# Altium PCB UZ_D_Template.PcbDoc
Units mm, origin at the board's own origin, x right, y up, seen from the top; angles counter-clockwise.
Board outline 155.98 x 100 mm, 4 copper layers (Top Layer, Layer 1, Layer 2, Bottom Layer), stack 0.98 mm thick; 24 components, 57 nets, 138 pads, 0 vias.
Unrouted connection lines stored in the file: 179.
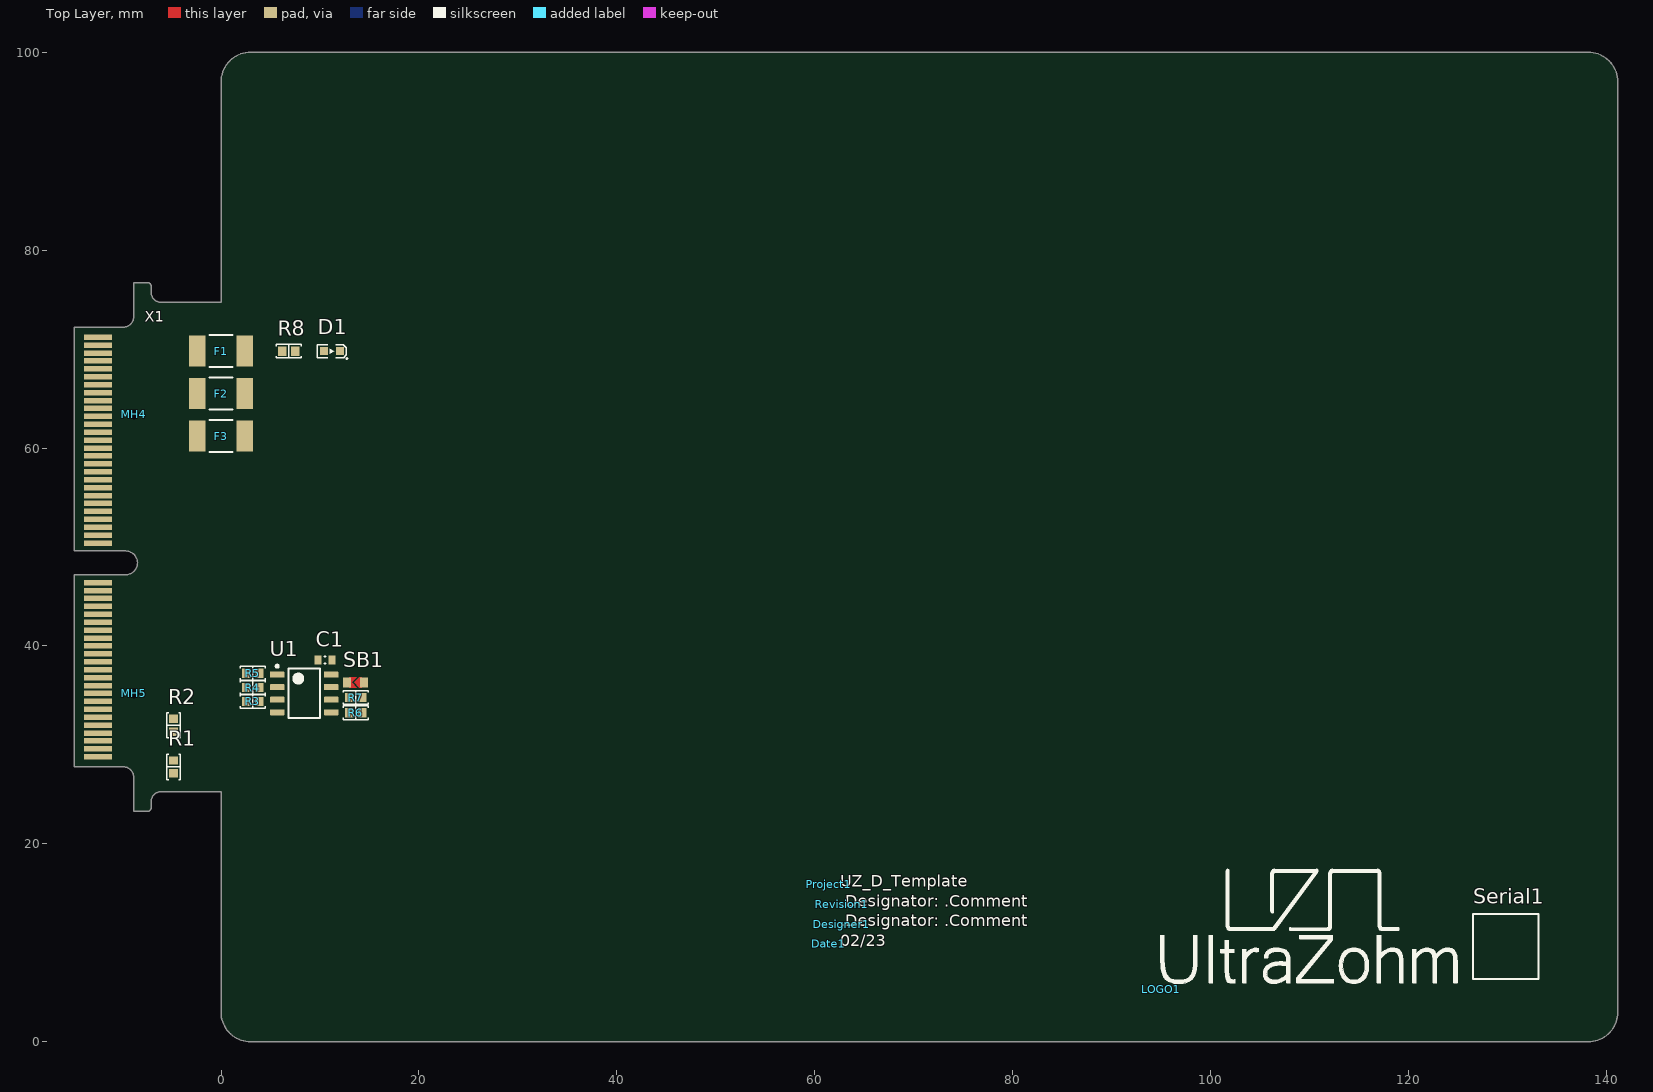
[diagram p0: Top Layer view]
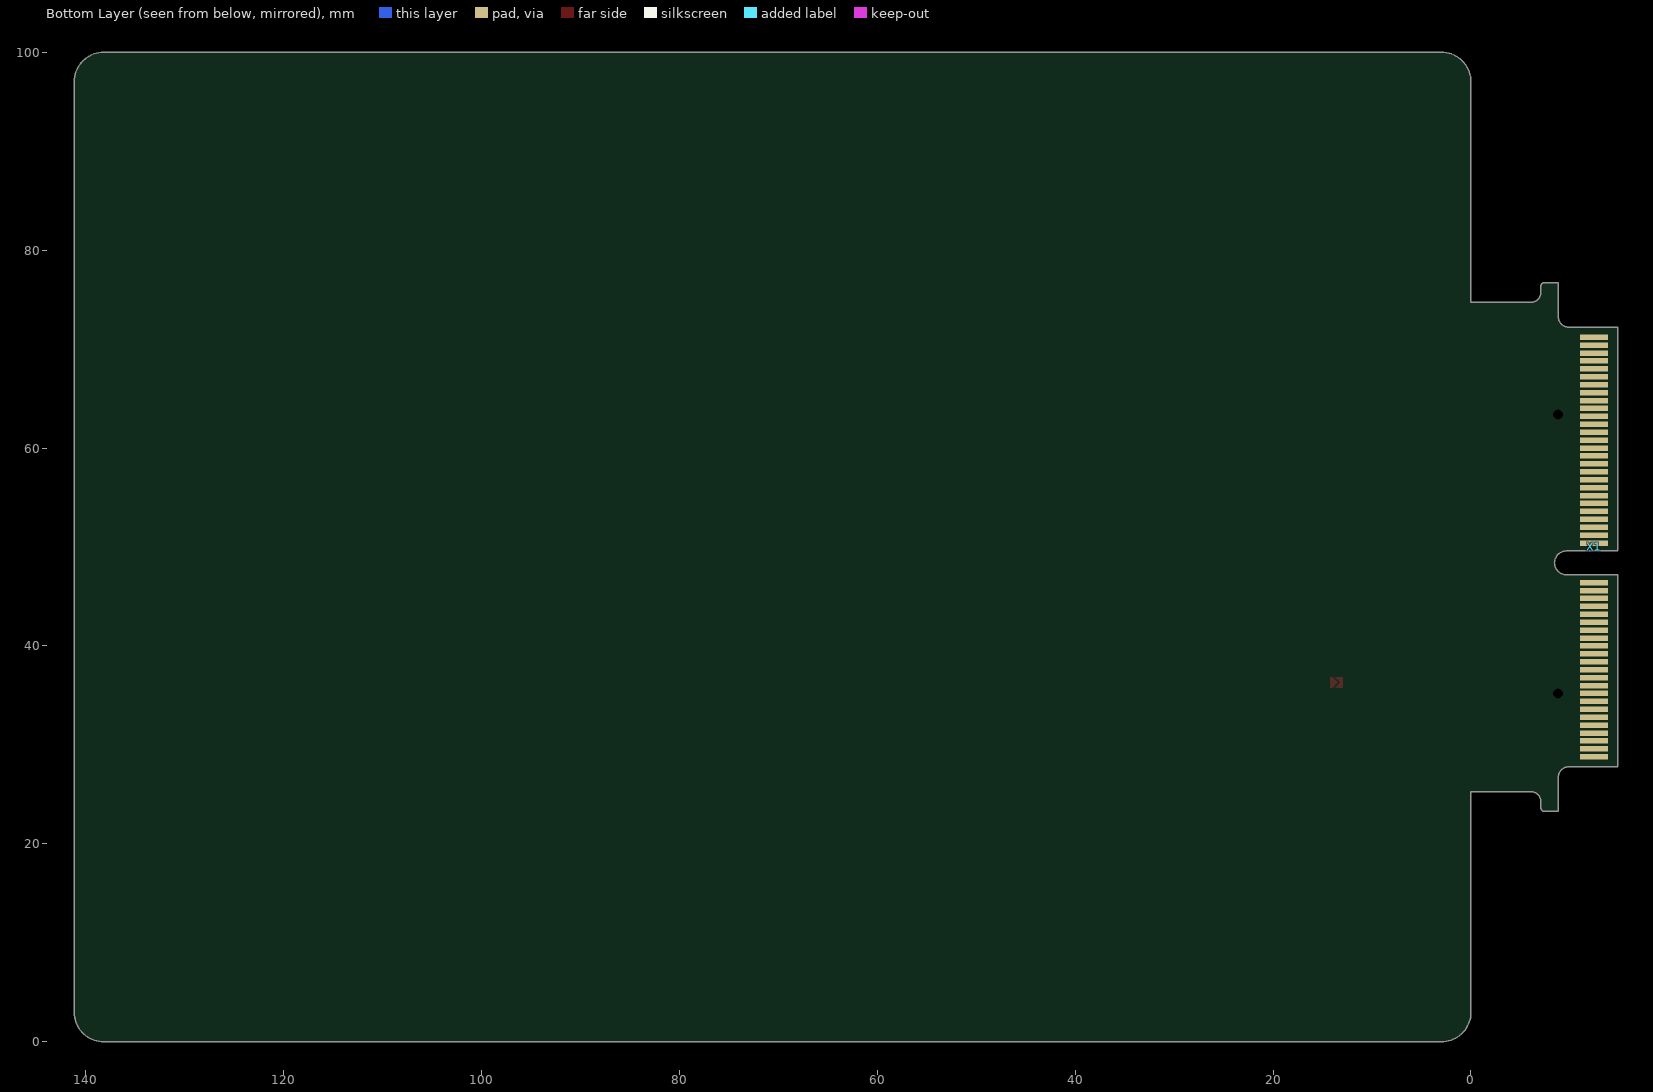
[diagram p1: Bottom Layer view, seen from below]

## Layer stack, top to bottom
Top Solder: solder mask 0.0102, Solder Resist, Dk 3.5
Top Layer: signal copper 0.035
Dielectric 2: prepreg 0.115, FR-4, Dk 4.4
Dielectric 4: prepreg 0.115, FR-4, Dk 4.4
Layer 1: signal copper 0.035
Dielectric 1: core 0.38, Core-036, Dk 4.4
Layer 2: signal copper 0.035
Dielectric 5: prepreg 0.115, FR-4, Dk 4.4
Dielectric 3: prepreg 0.115, FR-4, Dk 4.4
Bottom Layer: signal copper 0.035
Bottom Solder: solder mask 0.0102, Solder Resist, Dk 3.5

## Board outline
-14.84,27.775 -9.84,27.775 cw(c-9.84,26.775) -8.84,26.775 -8.84,23.275 -7.46,23.275 ccw(c-7.46,23.675) -7.06,23.675 -7.06,24.275 cw(c-6.06,24.275) -6.06,25.275 0,25.275 0,3 ccw(c3,3) 3,0 138.141,0 ccw(c138.141,3) 141.141,3 141.141,97 ccw(c138.141,97) 138.141,100 3,100 ccw(c3,97) 0,97 0,74.725 -6.06,74.725 cw(c-6.06,75.725) -7.06,75.725 -7.06,76.325 ccw(c-7.46,76.325) -7.46,76.725 -8.84,76.725 -8.84,73.225 cw(c-9.84,73.225) -9.84,72.225 -14.84,72.225 -14.84,49.6 -9.64,49.6 cw(c-9.64,48.4) -9.64,47.2 -14.84,47.2

## Design rules (kind name [scope] priority, off if disabled: settings)
AssemblyTestPointUsage [InNetClass('3V3_SingleEnded') or InNetClass('5V_SingleEnded') or InNetClass('15V_SingleEnded') or InNetClass('DifferentialSignals')] p1:
BoardOutlineClearance [All] p1: gap=0.5 ignorepadtopadclearanceinfootprint=FALSE except(0: Arc-SplitContinuation Track-SplitContinuation SMDPad-SplitContinuation THPad-SplitContinuation Via-SplitContinuation Fill-SplitContinuation Poly-SplitContinuation Region-SplitContinuation Text-SplitContinuation)
Clearance Clearance_Differential [InNetClass('DifferentialSignals')] p1: gap=0.1 ignorepadtopadclearanceinfootprint=TRUE except(0: Arc-Hole Track-Hole SMDPad-Hole THPad-Hole Via-Hole Fill-Hole Poly-Hole Region-Hole Text-Hole; 0.3: SMDPad-Via; 0.4: THPad-Via)
Clearance Clearance_Power [InNetClass('Power')] p2: gap=0.1 ignorepadtopadclearanceinfootprint=TRUE except(0: Arc-Hole Track-Hole SMDPad-Hole THPad-Hole Via-Hole Fill-Hole Poly-Hole Region-Hole Text-Hole; 0.15: Via-Poly; 0.2: Track-Poly; 0.25: THPad-Poly; 0.3: Fill-Poly Poly-Region; 0.5: Poly-Poly)
Clearance [All] p3: gap=0.1 ignorepadtopadclearanceinfootprint=TRUE except(0: Arc-Hole Track-Hole SMDPad-Hole THPad-Hole Via-Hole Fill-Hole Poly-Hole Region-Hole Text-Hole; 0.4: SMDPad-Via THPad-Via; 0.5: Poly-Poly)
ComponentClearance [All] p1: gap=0.1 collisioncheckmode=3 verticalgap=0.1 showdistances=FALSE
DiffPairsRouting [InNetClass('DifferentialSignals')] p1: maxlimit=0.25 minlimit=0.127 mostfreqgap=0.25 toplayer_maxgap=0.127 toplayer_prefgap=0.127 toplayer_minwidth=0.285 toplayer_maxwidth=0.285 toplayer_prefwidth=0.285 midlayer1_minwidth=0.069 midlayer1_maxwidth=0.15 midlayer1_prefwidth=0.15 midlayer2_mingap=0.165 midlayer2_minwidth=0.1 midlayer2_maxwidth=0.15 midlayer2_prefwidth=0.15 bottomlayer_maxgap=0.127 bottomlayer_prefgap=0.127 bottomlayer_minwidth=0.285 bottomlayer_maxwidth=0.285 bottomlayer_prefwidth=0.285 impedanceprofiledriven=TRUE impedanceprofileid={5F7DE71B-7B0B-4CDE-8AE7-8AD61221F3A5} impedanceprofilevalue=100.000000 maxuncoupledlength=12.7
FanoutControl Fanout_Power [InNetClass('Power') or InNet('ENABLE')] p1: bgadir=Out bgaviamode=Centered fanoutstyle=Auto fanoutdirection=None viagrid=0.025
FanoutControl Fanout_RS422 [InNetClass('DifferentialSignals')] p2: bgadir=Out bgaviamode=Closest fanoutstyle=Rows fanoutdirection=OutOnly viagrid=0.025
FanoutControl Fanout_BGA [IsBGA] p3 off: bgadir=Out bgaviamode=Centered fanoutstyle=Auto fanoutdirection=Alternating viagrid=0.025 // Fanout_BGA (Default Rule)
FanoutControl Fanout_LCC [IsLCC] p4 off: bgadir=Out bgaviamode=Centered fanoutstyle=Auto fanoutdirection=Alternating viagrid=0.025 // Fanout_LCC (Default Rule)
FanoutControl Fanout_SOIC [IsSOIC] p5 off: bgadir=Out bgaviamode=Centered fanoutstyle=Auto fanoutdirection=Alternating viagrid=0.025 // Fanout_SOIC (Default Rule)
FanoutControl Fanout_Small [(CompPinCount < 5)] p6 off: bgadir=Out bgaviamode=Centered fanoutstyle=Auto fanoutdirection=OutThenIn viagrid=0.025 // Fanout_Small (Default Rule)
FanoutControl Fanout_Default [All] p7: bgadir=NE bgaviamode=Closest fanoutstyle=Rows fanoutdirection=InOnly viagrid=0.025 // Fanout_Default (Default Rule)
Height [All] p1: minheight=0 maxheight=50 prefheight=12.7
HoleSize [All] p1: absolutevalues=TRUE maxlimit=4 minlimit=0.025 maxpercent=80.000 minpercent=20.000
PolygonConnect PolygonConnect_Therm [HoleSize > 2.6] p1: connectstyle=Direct reliefconductorwidth=0.254 reliefentries=4 polygonreliefangle="90 Angle" airgapwidth=0.254
PolygonConnect PolygonConnect_via [InPadClass('pad') or IsVia] p2: connectstyle=Direct reliefconductorwidth=0.254 reliefentries=4 polygonreliefangle="90 Angle" airgapwidth=0.254
PolygonConnect [All] p3: connectstyle=Relief reliefconductorwidth=0.3 reliefentries=4 polygonreliefangle="90 Angle" airgapwidth=0.25
RoomDefinition Component_LowerEdgeKeepOut [All] p1: confinementstyle=ConfineOut formatcopy=TRUE lockcomponents=FALSE outline 0,0 142,0 142,3 0,3
RoomDefinition Component_UpperEdgeKeepOut [All] p2: confinementstyle=ConfineOut formatcopy=TRUE lockcomponents=FALSE outline 0,97 142,97 142,100 0,100
RoutingLayers RoutingLayers_3V3Signals [InNetClass('3V3_SingleEnded')] p1 off: top layer_v5=TRUE mid layer 1_v5=TRUE mid layer 2_v5=TRUE bottom layer_v5=TRUE
RoutingLayers RoutingLayers_SingleEnded [InNetClass('15V_SingleEnded') or InNetClass('3V3_SingleEnded') or InNetClass('5V_SingleEnded')] p2 off: top layer_v5=TRUE mid layer 1_v5=TRUE mid layer 2_v5=TRUE bottom layer_v5=TRUE
RoutingLayers RoutingLayers_Differential [InNetClass('DifferentialSignals')] p3 off: top layer_v5=TRUE mid layer 1_v5=TRUE mid layer 2_v5=TRUE bottom layer_v5=FALSE
RoutingLayers [All] p4: top layer_v5=TRUE mid layer 1_v5=TRUE mid layer 2_v5=TRUE bottom layer_v5=TRUE
RoutingVias [All] p1: holewidth=0.3 width=0.5 viastyle="Through Hole" minholewidth=0.2 minwidth=0.4 maxholewidth=0.5 maxwidth=1
SolderMaskExpansion [All] p1: expansion=0.102 istentingtop=FALSE
UnRoutedNet UnRoutedNet_Signals [InNetClass('15V_SingleEnded') or InNetClass('3V3_SingleEnded') or InNetClass('5V_SingleEnded') or InNetClass('DifferentialSignals')] p1: checkbadconnections=TRUE
UnRoutedNet [All] p2: checkbadconnections=TRUE
Width Width_Power [InNetClass('Power')] p1: maxlimit=10 minlimit=0.2 preferedwidth=0.3 minimp=50.000000 maximp=50.000000 favimp=50.000000
Width [All] p2: maxlimit=10 minlimit=0.1 preferedwidth=0.3 midlayer1_prefwidth=0.15 midlayer2_prefwidth=0.15 minimp=50.000000 maximp=50.000000 favimp=50.000000
18 further rules are at their usual default settings.

## Classes and differential pairs
component class X1: C1 D1 F1 F2 F3 R1 R2 R3 R4 R5 R6 R7 R8 SB1 U1 X1

## Components (designator, comment, footprint, x,y, rotation, side; value= is the part's Value field where it differs from the comment)
C1 "100 nF" C_0603 10.5,38.6 r180 top
D1 "150060BS84000" WL-SMCW_0603 11.2,69.8 r180 top
Date1 "02/23" COMMENT 61.43,9.9 r0 top
Designer1 "A. Musterfrau" Designator:comment 62.7,11.9 r0 top
F1 "Littelfuse_PTC_1812" 1812_PTC_Polyfuse_Littelfuse 0,69.8 r0 top value="PTC, 1.1 A, 24V"
F2 "Littelfuse_PTC_1812" 1812_PTC_Polyfuse_Littelfuse 0,65.5 r0 top value="PTC, 1.1 A, 24V"
F3 "Littelfuse_PTC_1812" 1812_PTC_Polyfuse_Littelfuse 0,61.2 r0 top value="PTC, 1.1 A, 24V"
LOGO1 "UZ Logo" UZ_Logo_small 94.996,5.334 r0 top
MH4 "alignment hole 1mm" MH_1#1 -7,56.6 r90 top
MH5 "alignment hole 1mm" MH_1#2 0.1,46.6 r90 top (schematic designator MH4)
Project1 "UZ_D_Template" COMMENT 61.43,15.9 r0 top
R1 "0R" "RES 0603_1608" -4.8,27.775 r90 top
R2 "0R" "RES 0603_1608" -4.8,31.991 r270 top
R3 "4k7" "RES 0603_1608" 3.2,34.391 r180 top
R4 "4k7" "RES 0603_1608" 3.2,35.8 r180 top
R5 "4k7" "RES 0603_1608" 3.2,37.25 r180 top
R6 "100k" "RES 0603_1608" 13.6,33.261 r0 top
R7 "100k" "RES 0603_1608" 13.6,34.791 r0 top
R8 "24k9" "RES 0603_1608" 6.85,69.8 r180 top
Revision1 "Rev01" Designator:comment 62.7,13.9 r0 top
SB1 "Solder Bump 0603" SB_0603 13.6,36.308 r0 top
Serial1 "Serial #" SERIAL 128.524,11.733 r0 top
U1 "M24C02-WMN6TP" D0008A_N 8.4,35.203 r0 top
X1 "HSEC8-150-01-XX-DV-A-BL-CARD" HSEC8-150-01-XX-DV-A-BL-CARD -14.84,50 r270 bottom locked

## Footprints (in the part's own frame and the unit in brackets; to place one, negate y for a bottom-side part, rotate by r counter-clockwise, add the part's x,y. Pads: shape width x height; smd on the part's side, far side on the other; paste and mask are expansions set on the pad)
1812_PTC_Polyfuse_Littelfuse [mm] "Chip Fuse, 2-Leads, Body 4.6x3.24mm"
  rect 1.68x3.14 smd: 1(-2.39,0) 2(2.39,0)
  silkscreen extent -1.15,-1.62 1.15,1.62, body extent -2.3,-1.62 2.3,1.62, height 1.15
C_0603 [mm] "Chip Capacitor, Body 1.6x0.8mm, Height 1.0mm, IPC High Density"
  rect 0.7x0.9 smd: 1(-0.7,0) 2(0.7,0)
  silkscreen extent -0.05,-0.35 0.05,0.35, body extent -0.87,-0.47 0.88,0.48, height 1
COMMENT [mm] "prints out the comment of a component"
D0008A_N [mm] "SOIC, 8-Leads, Body 5x4mm, Pitch 1.27mm, IPC Medium Density"
  rrect17% 1.45x0.6 smd: 1(-2.725,1.905) 2(-2.725,0.635) 3(-2.725,-0.635) 4(-2.725,-1.905) 5(2.725,-1.905) 6(2.725,-0.635) 7(2.725,0.635) 8(2.725,1.905)
  silkscreen extent -2.85,-2.5 1.6,2.88, body extent -3,-2.45 3,2.45, height 1.63
Designator:comment [mm] "prints out designator and comment of a component"
HSEC8-150-01-XX-DV-A-BL-CARD [mm]
  rect 0.55x2.8 smd far side mask+0.05: 1(-21.2,-2.4) 3(-20.4,-2.4) 5(-19.6,-2.4) 7(-18.8,-2.4) 9(-18,-2.4) 11(-17.2,-2.4) 13(-16.4,-2.4) 15(-15.6,-2.4) 17(-14.8,-2.4) 19(-14,-2.4) 21(-13.2,-2.4) 23(-12.4,-2.4) 25(-11.6,-2.4) 27(-10.8,-2.4) 29(-10,-2.4) 31(-9.2,-2.4) 33(-8.4,-2.4) 35(-7.6,-2.4) 37(-6.8,-2.4) 39(-6,-2.4) 41(-5.2,-2.4) 43(-4.4,-2.4) 45(-3.6,-2.4) 47(-2.8,-2.4) 49(-2,-2.4) 51(-1.2,-2.4) 53(-0.4,-2.4) 55(3.6,-2.4) 57(4.4,-2.4) 59(5.2,-2.4) 61(6,-2.4) 63(6.8,-2.4) 65(7.6,-2.4) 67(8.4,-2.4) 69(9.2,-2.4) 71(10,-2.4) 73(10.8,-2.4) 75(11.6,-2.4) 77(12.4,-2.4) 79(13.2,-2.4) 81(14,-2.4) 83(14.8,-2.4) 85(15.6,-2.4) 87(16.4,-2.4) 89(17.2,-2.4) 91(18,-2.4) 93(18.8,-2.4) 95(19.6,-2.4) 97(20.4,-2.4) 99(21.2,-2.4)
  rect 0.55x2.8 smd mask+0.05: 2(-21.2,-2.4) 4(-20.4,-2.4) 6(-19.6,-2.4) 8(-18.8,-2.4) 10(-18,-2.4) 12(-17.2,-2.4) 14(-16.4,-2.4) 16(-15.6,-2.4) 18(-14.8,-2.4) 20(-14,-2.4) 22(-13.2,-2.4) 24(-12.4,-2.4) 26(-11.6,-2.4) 28(-10.8,-2.4) 30(-10,-2.4) 32(-9.2,-2.4) 34(-8.4,-2.4) 36(-7.6,-2.4) 38(-6.8,-2.4) 40(-6,-2.4) 42(-5.2,-2.4) 44(-4.4,-2.4) 46(-3.6,-2.4) 48(-2.8,-2.4) 50(-2,-2.4) 52(-1.2,-2.4) 54(-0.4,-2.4) 56(3.6,-2.4) 58(4.4,-2.4) 60(5.2,-2.4) 62(6,-2.4) 64(6.8,-2.4) 66(7.6,-2.4) 68(8.4,-2.4) 70(9.2,-2.4) 72(10,-2.4) 74(10.8,-2.4) 76(11.6,-2.4) 78(12.4,-2.4) 80(13.2,-2.4) 82(14,-2.4) 84(14.8,-2.4) 86(15.6,-2.4) 88(16.4,-2.4) 90(17.2,-2.4) 92(18,-2.4) 94(18.8,-2.4) 96(19.6,-2.4) 98(20.4,-2.4) 100(21.2,-2.4)
MH_1#1 [mm]
  round 0 hole 1 unplated mask-2539.97: 1(6.8,1.8)
MH_1#2 [mm]
  round 0 hole 1 unplated: 1(-11.4,8.9)
"RES 0603_1608" [mm] "Chip Resistor, 2-Leads, Body 1.60x0.80mm, IPC Medium Density"
  rect 0.85x0.95 smd: 1(-0.65,0) 2(0.65,0)
  silkscreen extent -1.27,-0.7 1.27,0.7, body extent -0.8,-0.4 0.8,0.4, height 0.45
SB_0603 [mil] "Solder Bump"
  rect 32x40 smd: 1(33.75,0) 2(-33.75,0)
  Top Layer region: 23.75,20 13.75,20 -6.25,0 13.75,-20 23.75,-20
  Top Layer region: -26.25,0 -16.25,0 3.75,20 -26.25,20
  Top Layer region: -26.25,0 -16.25,0 3.75,-20 -26.25,-20
SERIAL [mm]
  silkscreen extent -2,-5.4 4.6,1.2
UZ_Logo_small [mm] "logo width 3cm"
  silkscreen extent -0.05,0.57 29.94,12.12
WL-SMCW_0603 [mm] "SMD Mono-color Chip LED, body 1.6x0.8mm"
  rect 0.8x0.8 smd: 1(-0.8,0) 2(0.8,0)
  silkscreen extent -1.59,-0.65 1.45,0.83, body extent -0.8,-0.4 0.8,0.4, height 0.7

## Part data
C1: library part C0603C104K9PACTU, "Capacitor 0603, 6.3 VDC, 100 nF, X5R", Device Package=0603, Manufacturer=KEMET, Operating Temperature="-55 - 85°C", Supplier Part Number 1=80-C0603C104K9P, Tolerance="10 %", Voltage Rating="6.3 VDC", Component Type="Capacitor 0603", ComponentLink1Description=Datasheet, ComponentLink1URL=https://www.mouser.de/datasheet/2/212/KEM_C1006_X5R_SMD-1103249.pdf, Created from=MGremer, Created On="20.12.2020 13:54:13", Last Updated="20.01.2021 13:57:36", Live Cycle Status=1, Manufacturer Part Number=C0603C104K9PACTU, Mounting Type=SMD, PartID=70, Series="SMD Comm X5R", Stock number="not stored", Supplier 1=Mouser, Type=Capacitor
D1: "WL-SMCW SMD Mono-color Chip LED Waterclear Blue", Color=blue, Device Package=0603, Forward Current I_f="20 mA", Forward Voltage U_f="3.2 V", Manufacturer="Wuerth Elektronik", Nominal Power="78 mW", Operating Temperature="-40 - 85 °C", Supplier Part Number 1=710-150060BS84000, Component Type="LED Diode", ComponentLink1Description=Datasheet, ComponentLink1URL=https://www.mouser.de/datasheet/2/445/150060BS84000-1838909.pdf, Created from=MGremer, Created On="08.12.2020 10:19:38", Last Updated="03.03.2021 09:59:51", Light Intensity="560 mcd", Live Cycle Status=1, Manufacturer Part Number=150060BS84000, Mounting Type=SMD, PartID=1, Stock number="not stored", Supplier 1=Mouser, Supplier 2=Farnell, Supplier 3=Digi-Key, Supplier Part Number 2=3408611, Supplier Part Number 3=732-150060BS84000CT-ND, Type=Standard, Wavelength="470 nm"
Date1: library part 5, "Create a project parameter named \"FinDate\" this is the value of this component. It is printed on the PCB. Once the parameter is updated (e.g. new revision) it gets updated on the PCB as well", Manufacturer="PCB Manufacturer", Manufacturer Part Number="Project End Date", Component Type="Date of Project Finalization", Created from="T. Wendt", Created On="01.03.2021 09:01:41", Last Updated="01.03.2021 09:01:41", Live Cycle Status=1, PartID=5, Type="Standard (No BOM)"
Designer1: library part 4, "Create a project parameter named \"Author\" this is the value of this component. It is printed on the PCB. Once the parameter is updated (e.g. new revision) it gets updated on the PCB as well", Manufacturer="PCB Manufacturer", Manufacturer Part Number="Project Author", Component Type="Project Author", Created from="T. Wendt", Created On="01.03.2021 08:53:41", Last Updated="01.03.2021 09:20:27", Live Cycle Status=1, PartID=4, Type="Standard (No BOM)"
F1 F2 F3: "POLYSWITCH RESETTABLE DEVICES", Hold Current=1.1A, LCSC Part Number=C70119, Manufacturer=Littelfuse, MPN=miniASMDC110F/24, Nominal current="1 A", Operating Temperature="-40 - 85 °C", Package=1812, Resistance="0.18 Ohm", Supplier Part Number 1=530-0ZCG0150BF2C, Trip Current=2.2A, Voltage=24V, Component Type=Littelfuse_PTC_1812, ComponentLink1Description=Datasheet, ComponentLink1URL=https://www.littelfuse.com/~/media/electronics/datasheets/resettable_ptcs/littelfuse_ptc_surface_mount_catalog_datasheet.pdf.pdf, Created=2019_02_10_AGeiger, Created from=MHlatky, Created On="07.05.2021 06:50:33", Last Updated="27.05.2022 15:06:17", Live Cycle Status=1, Manufacturer Part Number=Littelfuse_PTC_1812, MF=Littelfuse, Mounting Type=SMD, PartID=5, Supplier 1=Mouser, Type=Fuse
LOGO1: library part 1, "Official Project Logo of the UltraZohm", Manufacturer="PCB Manufacturer", Manufacturer Part Number="UltraZohm Logo", Component Type=Logo, ComponentLink1Description=Homepage, ComponentLink1URL=https://ultrazohm.com, Created from="T. Wendt", Created On="19.02.2021 16:55:56", Last Updated="02.03.2021 14:31:24", Live Cycle Status=1, PartID=1, Type="Standard (No BOM)"
MH4 MH5: library part "Mounting Hole - 1mm", "Non plated through hole, 1mm"
Project1: library part 2, "Create a project parameter named \"ProjectNameCustom\" this is the value of this component and it is printed on the PCB.", Manufacturer="PCB Manufacturer", Manufacturer Part Number="Project Name", Component Type="Project Name", Created from="T. Wendt", Created On="01.03.2021 08:43:57", Last Updated="01.03.2021 09:07:27", Live Cycle Status=1, PartID=2, Type="Standard (No BOM)"
R1 R2: library part RC0603JR-070RL, "SMD resistor E24 series", Device Package=0603, LCSC Part Number=C21189, Manufacturer=YAGEO, Supplier Part Number 1=603-RC0603JR-070RL, Tolerance=5%, Component Type="SMD resistor", ComponentLink1Description=Datasheet, ComponentLink1URL=https://www.mouser.de/datasheet/2/447/PYu-RC_Group_51_RoHS_L_10-1664068.pdf, Created from=MGremer, Created On="14.12.2020 16:17:14", Last Updated="04.03.2021 09:09:42", Live Cycle Status=1, Manufacturer Part Number=RC0603JR-070RL, Mounting Type=SMD, PartID=1, Stock number="Labor SMD Container", Supplier 1=Mouser, Supplier 2=LCSC, Supplier Part Number 2=C21189, Type=Resistor
R3 R4 R5: library part 0603WAF4701T5E, "SMD resistor E24 series", Device Package=0603, LCSC Part Number=C23162, Manufacturer=UNI-ROYAL, Tolerance=1%, Component Type="SMD resistor", ComponentLink1Description=Datasheet, ComponentLink1URL=https://datasheet.lcsc.com/lcsc/2206010116_UNI-ROYAL-Uniroyal-Elec-0603WAF4701T5E_C23162.pdf, Created from=AGeiger, Created On="14.12.2020 16:17:14", Last Updated="25.08.2022 20:03:04", Live Cycle Status=1, Manufacturer Part Number=0603WAF4701T5E, Mounting Type=SMD, PartID=90, Stock number="Labor SMD Container", Supplier 1=LCSC, Supplier Part Number 1=C23162, Type=Resistor
R6 R7: library part RK73B1JTTD104J, "SMD resistor E24 series", Device Package=0603, LCSC Part Number=C25803, Manufacturer="KOA Speer", Supplier Part Number 1=660-RK73B1JTTD104J, Tolerance=5%, Component Type="SMD resistor", ComponentLink1Description=Datasheet, ComponentLink1URL=https://www.mouser.de/datasheet/2/219/RK73B-1825463.pdf, Created from=MGremer, Created On="14.12.2020 16:17:14", Last Updated="27.05.2022 14:04:10", Live Cycle Status=1, Manufacturer Part Number=RK73B1JTTD104J, Mounting Type=SMD, PartID=122, Stock number="Labor SMD Container", Supplier 1=Mouser, Type=Resistor
R8: library part CRCW060324K9FKEA, "SMD resistor 1%", Device Package=0603, Manufacturer=Vishay, Supplier Part Number 1=71-CRCW0603-24.9K-E3, Tolerance=1%, Component Type="SMD resistor", ComponentLink1Description=Datasheet, ComponentLink1URL=https://www.mouser.de/datasheet/2/427/dcrcwe3-1762152.pdf, Created from=MGremer, Created On="14.12.2020 16:17:14", Last Updated="02.03.2021 14:07:32", Live Cycle Status=1, Manufacturer Part Number=CRCW060324K9FKEA, Mounting Type=SMD, PartID=157, Stock number="not stored", Supplier 1=Mouser, Type=Resistor
Revision1: library part 3, "Create a project parameter named \"ProjectRevision\" this is the value of this component. It is printed on the PCB. Once the parameter is updated (e.g. new revision) it gets updated on the PCB as well", Manufacturer="PCB Manufacturer", Manufacturer Part Number="Project Revision", Component Type="Project Revision", Created from="T. Wendt", Created On="01.03.2021 08:50:34", Last Updated="01.03.2021 09:28:36", Live Cycle Status=1, PartID=3, Type="Standard (No BOM)"
SB1: library part =Value, Device Package=0603, Component Type="Solder Bump", Created from=AGeiger, Created On="09.01.2024 17:13:56", Last Updated="09.01.2024 17:13:56", Manufacturer Part Number="Solder Bump 0603", Mounting Type=SMD, PartID=1, Revision="July-2002: Re-released for DXP Platform."
Serial1: library part 6, "Field to put in a serial number", Manufacturer="PCB Manufacturer", Manufacturer Part Number="Serial Number", Component Type="Serial Number", Created from="T. Wendt", Created On="02.03.2021 14:31:24", Last Updated="02.03.2021 14:31:24", Live Cycle Status=1, PartID=6, Type="Standard (No BOM)"
U1: "2Kbit I2C SOP-8 EEPROM ROHS", Device Package=SOIC-8, LCSC Part Number=C7562, Manufacturer=STMicroelectronics, Operating Temperature="-40 to +85 °C", Supplier Part Number 1=511-M24C02-WMN6TP, Component Type=EEPROM, ComponentLink1Description=Datasheet, ComponentLink1URL=https://www.st.com/resource/en/datasheet/m24c01-w.pdf, Created from=AGeiger, Created On="19.11.2023 14:54:27", Last Updated="19.11.2023 21:39:04", Manufacturer Part Number=M24C02-WMN6TP, Mounting Type=SMD, PartID=1, Series=M24xxx, Supplier 1=Mouser, Supplier 2=LCSC, Supplier Part Number 2=C7562, Type=Memory
X1: "Mating Card Layout for HSEC8-150-01-XX-DV-A-BL", Manufacturer=SAMTEC, Created=2018_04_23_AGeiger

## Nets (pads, with @x,y where several pads share a name; then routed paths per layer and width w, separated by ;. In a path a pad name is that pad's centre, name@x,y a point inside that pad or via, vN(x,y) a via of type N, cw(c..) or ccw(c..) an arc to the next point about the centre after c; other vN are vias at no path point)
3V3: F3.2
3V3_PER: C1.1 F3.1 R3.2 R4.2 R5.2 R6.2 R7.2 SB1.1 U1.8 X1.13 X1.14
5V: F2.2
5V_PER: F2.1 X1.9 X1.10
ADDR_0: R5.1 U1.1 X1.79
ADDR_1: R4.1 U1.2 X1.95
ADDR_2: R3.1 U1.3 X1.80
Collective_FLT: X1.96
CPLD_DigIn_01: X1.83
CPLD_DigIn_02: X1.85
CPLD_DigOut_01: X1.84
CPLD_DigOut_02: X1.86
DIG_IO_00: X1.17
DIG_IO_01: X1.18
DIG_IO_02: X1.21
DIG_IO_03: X1.22
DIG_IO_04: X1.25
DIG_IO_05: X1.26
DIG_IO_06: X1.29
DIG_IO_07: X1.30
DIG_IO_08: X1.33
DIG_IO_09: X1.34
DIG_IO_10: X1.37
DIG_IO_11: X1.38
DIG_IO_12: X1.41
DIG_IO_13: X1.42
DIG_IO_14: X1.45
DIG_IO_15: X1.46
DIG_IO_16: X1.49
DIG_IO_17: X1.50
DIG_IO_18: X1.53
DIG_IO_19: X1.54
DIG_IO_20: X1.57
DIG_IO_21: X1.58
DIG_IO_22: X1.61
DIG_IO_23: X1.62
DIG_IO_24: X1.65
DIG_IO_25: X1.66
DIG_IO_26: X1.69
DIG_IO_27: X1.70
DIG_IO_28: X1.73
DIG_IO_29: X1.74
DIG_Res_00: X1.78
DIG_Res_03: X1.91
DIG_Res_04: X1.92
DIG_Res_05: X1.93
DIG_Res_06: X1.94
DIG_Res_08: X1.77
GND: C1.2 D1.1 R1.1 U1.4 X1.1 X1.2 X1.3 X1.4 X1.7 X1.8 X1.11 X1.12 X1.15 X1.16 X1.19 X1.20 X1.23 X1.24 X1.27 X1.28 X1.31 X1.32 X1.35 X1.36 X1.39 X1.40 X1.43 X1.44 X1.47 X1.48 X1.51 X1.52 X1.55 X1.56 X1.59 X1.60 X1.63 X1.64 X1.67 X1.68 X1.71 X1.72 X1.75 X1.76 X1.81 X1.82 X1.87 X1.88 X1.97 X1.98
I2C0_SCL: R7.1 U1.6 X1.89
I2C0_SDA: R6.1 U1.5 X1.90
NetD1_2: D1.2 R8.1
NetSB1_2: SB1.2 U1.7
PILOT_IN: R2.1 X1.100
PILOT_OUT: R1.2 R2.2 X1.99
VIN: F1.2 R8.2
VIN_unfused: F1.1 X1.5 X1.6
pads on no net: MH4.1 MH5.1

## Silkscreen, mask and mechanical layers (free items; w line width, h text height)
Mechanical 1:
  the board outline again, w0.05

## Dimensions
141.141,0 to 141.141,100 on Mechanical 2
146.143,97.802 to -14.84,72.216 on Mechanical 2
141.141,100 to -14.853,72.225 on Mechanical 2
141.141,100 to 0.031,100 on Mechanical 2

## Text inside footprints (layer, text, board x,y; h text height)
Serial1: Mechanical 5 "SerialNr" at 132.324,7.933 h0.7 r180